# Altium PCB ECUv2.PcbDoc
Units mil, origin at the board's own origin, x right, y up, seen from the top; angles counter-clockwise.
Board outline 2795 x 4000 mil, 2 copper layers (Top Layer, Bottom Layer); 10 components, 16 nets, 113 pads, 0 vias.
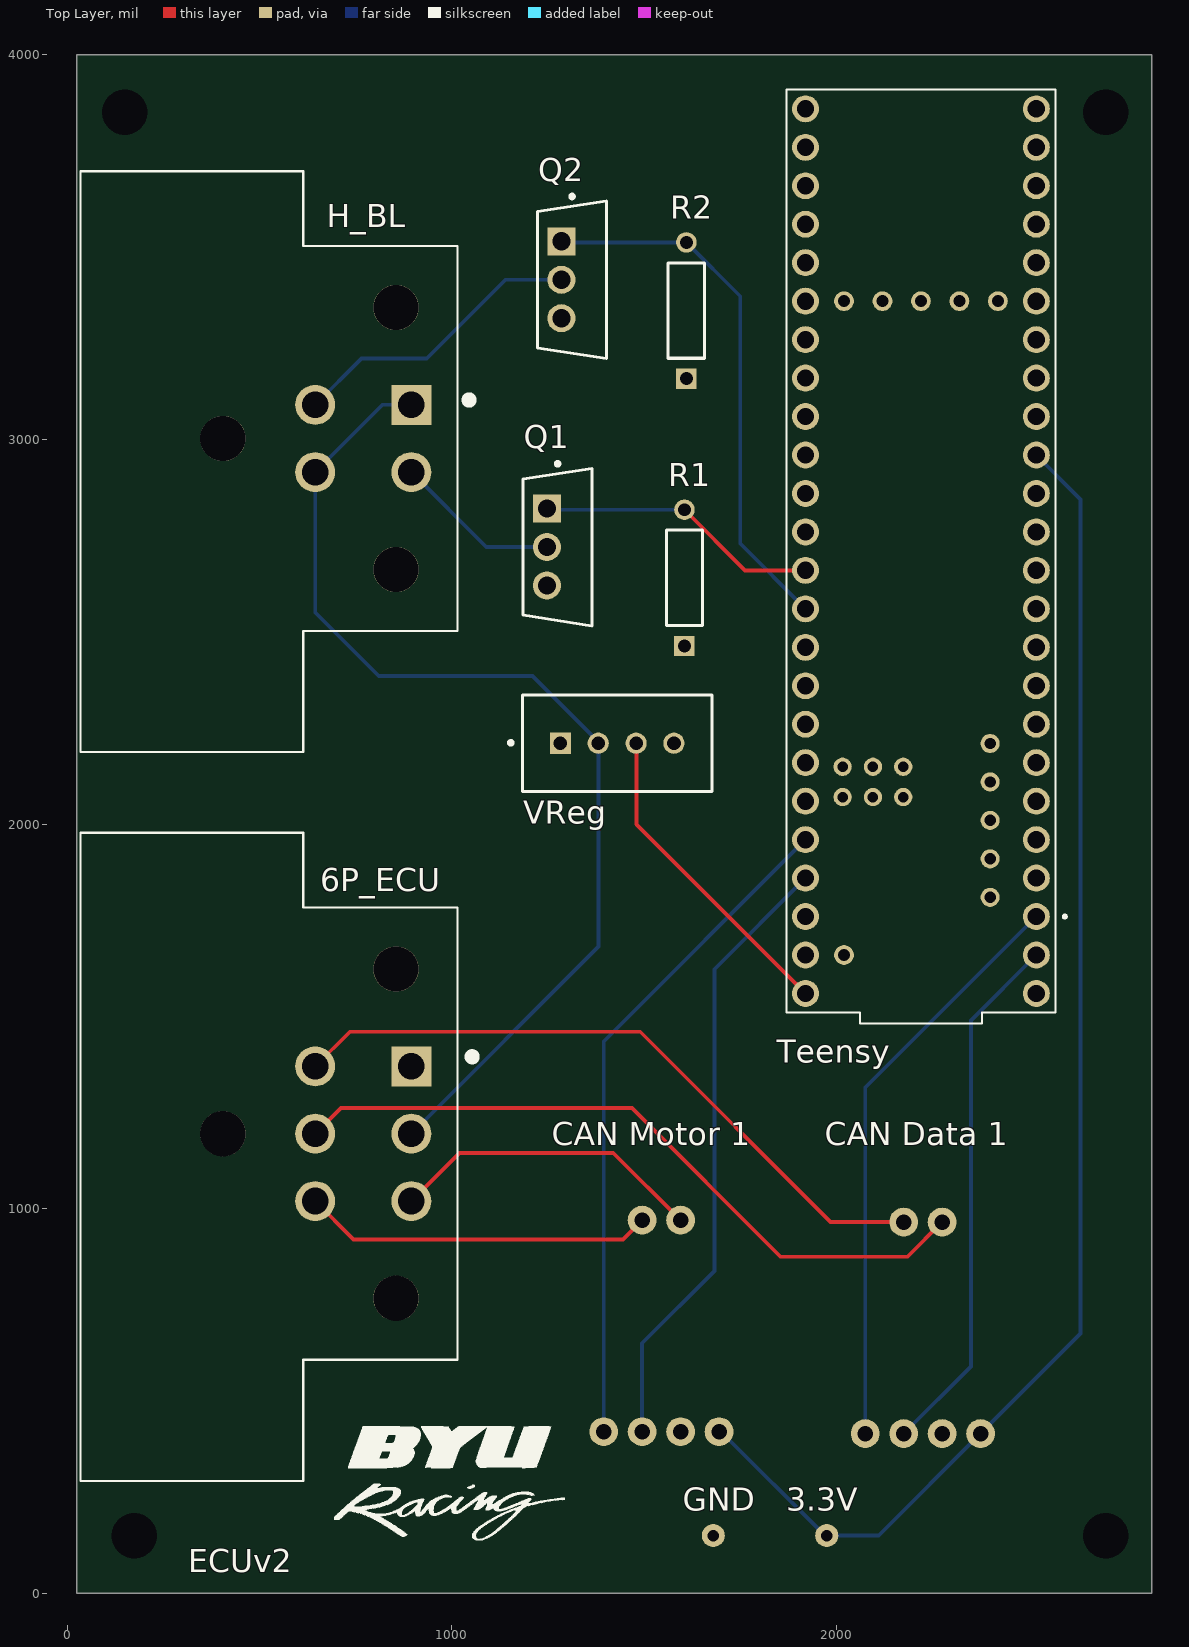
[diagram p0: Top Layer view]
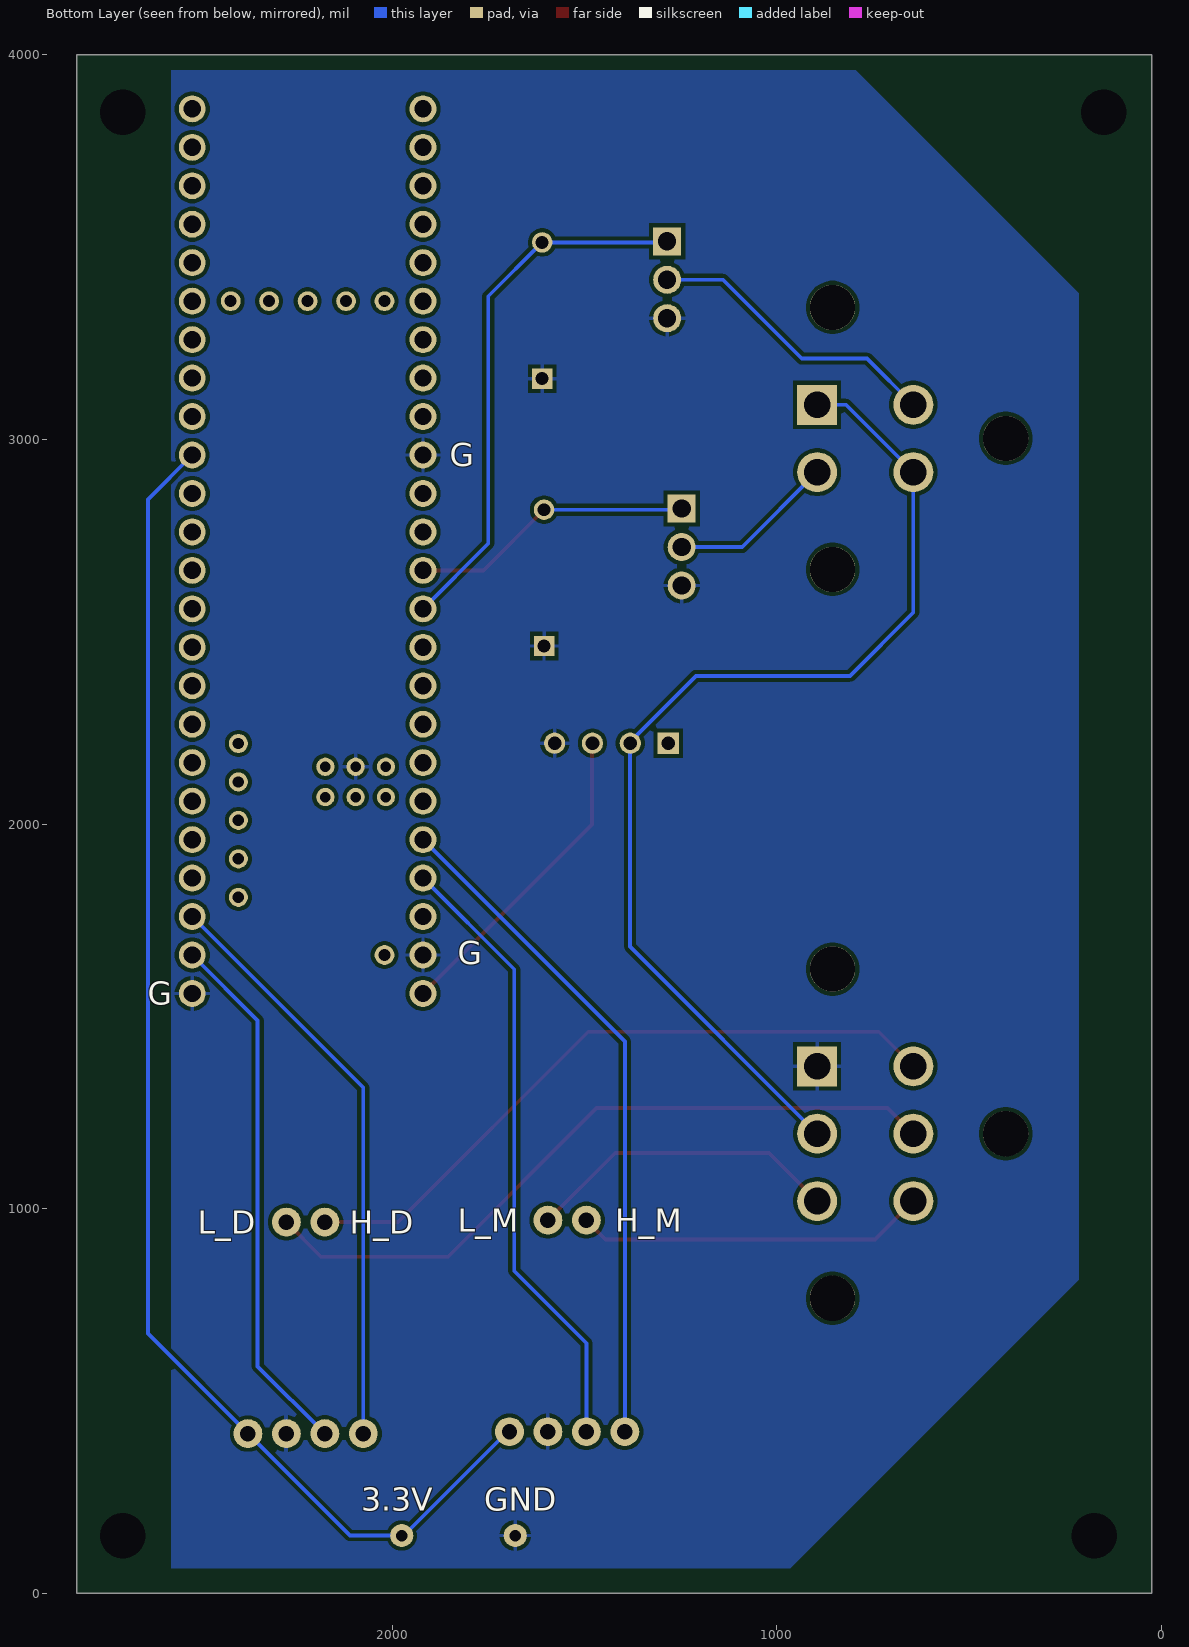
[diagram p1: Bottom Layer view, seen from below]

## Layer stack, top to bottom
Top Solder: solder mask 0.4, Solder Resist, Dk 3.5
Top Layer: signal copper 1.4
Dielectric 1: dielectric 12.6, FR-4, Dk 4.8
Bottom Layer: signal copper 1.4
Bottom Solder: solder mask 0.4, Solder Resist, Dk 3.5

## Board outline
25,0 2820,0 2820,4000 25,4000

## Design rules (kind name [scope] priority, off if disabled: settings)
Clearance [All] p1: gap=10 ignorepadtopadclearanceinfootprint=FALSE
HoleSize [All] p1: absolutevalues=TRUE maxlimit=120 minlimit=1 maxpercent=80.000 minpercent=20.000
PolygonConnect [All] p1: connectstyle=Relief reliefconductorwidth=10 reliefentries=4 polygonreliefangle="90 Angle" airgapwidth=10
RoutingVias [All] p1: holewidth=28 width=50 viastyle="Through Hole" minholewidth=28 minwidth=50 maxholewidth=28 maxwidth=50
SolderMaskExpansion [All] p1: expansion=4 istentingtop=FALSE
SupplyNets "Schematic Supply Nets" [InNet('GND')] p1: voltage=0.000
Width [All] p1: maxlimit=10 minlimit=10 preferedwidth=10
29 further rules are at their usual default settings.

## Components (designator, comment, footprint, x,y, rotation, side; value= is the part's Value field where it differs from the comment)
6P_ECU "DT13-6P" TE_DT13-6P 645,1194.8 r0 top
"CAN Data 1" "CAN Module" "CAN Module-Footprint-1" 2375,415 r90 top
"CAN Motor 1" "CAN Module" "CAN Module-Footprint-1" 1695,420 r90 top
H_BL "DT13-4P" TE_DT13-4P 645,3002.4 r0 top
Q1 "IRLZ44NPbF" FP-PG-TO220-3-MFG 1275,2720 r0 top
Q2 "IRLZ44NPbF" FP-PG-TO220-3-MFG 1312.76,3415 r0 top
R1 "MFR-25FBF5210K" RESA60-630X240 1605,2640 r90 top
R2 "MFR-25FBF5210K" RESA60-630X240 1610,3335 r90 top
Teensy "DEV-16771" MODULE_DEV-16771 2219.8,2709.37 r90 top
VReg "B04B-XASK-1(LF)(SN)" FP-B04B-XASK-1_LF_SN-MFG 1430,2210 r180 top

## Footprints (in the part's own frame and the unit in brackets; to place one, negate y for a bottom-side part, rotate by r counter-clockwise, add the part's x,y. Pads: shape width x height; smd on the part's side, far side on the other; paste and mask are expansions set on the pad)
"CAN Module-Footprint-1" [mil]
  round 75 hole 40: 1(0,300) 2(0,200) 3(0,100) 4(0,0) 5(550,200) 6(550,100)
FP-B04B-XASK-1_LF_SN-MFG [mm]
  rect 1.4x1.4 hole 0.9 paste-2539.97 mask+0: 1(3.75,0)
  round 1.4 hole 0.9 paste-2539.97 mask+0: 2(1.25,0) 3(-1.25,0) 4(-3.75,0)
  silkscreen extent -6.25,-3.2 7.15,3.2, body extent -6.35,-3.3 6.35,3.3, height 0.25
FP-PG-TO220-3-MFG [mm]
  rect 1.85x1.85 hole 1.2 paste-2539.97 mask+0: 1(-0.705,2.54)
  round 1.85 hole 1.2 paste-2539.97 mask+0: 2(-0.705,0) 3(-0.705,-2.54)
  silkscreen extent -2.27,-5.2 2.27,5.62, body extent -2.37,-5.55 2.37,5.55, height 0.25
MODULE_DEV-16771 [mil]
  round 70 hole 45: 0(-1050,-300) 1(-950,-300) 2(-850,-300) 3(-750,-300) 3.3V_1(250,-300) 3.3V_2(-950,300) 4(-650,-300) 5(-550,-300) 6(-450,-300) 7(-350,-300) 8(-250,-300) 9(-150,-300) 10(-50,-300) 11(50,-300) 12(150,-300) 13(150,300) 14(50,300) 15(-50,300) 16(-150,300) 17(-250,300) 18(-350,300) 19(-450,300) 20(-550,300) 21(-650,300) 22(-750,300) 23(-850,300) 24(350,-300) 25(450,-300) 26(550,-300) 27(650,-300) 28(750,-300) 29(850,-300) 30(950,-300) 31(1050,-300) 32(1150,-300) 33(1150,300) 34(1050,300) 35(950,300) 36(850,300) 37(750,300) 38(650,300) 39(550,300) 40(450,300) 41(350,300) GND1(-1150,-300) GND2(250,300) GND3(-1050,300) VIN(-1150,300)
  round 51.5 hole 31.5: 3.3V_3(650,-100) GND4(650,0) ON/OFF(650,200) PROGRAM(650,100) VBAT(650,-200) VUSB(-1050,200)
  round 49.53 hole 29.53: 5V(-900,-179.92) D+(-700,-179.92) D-(-800,-179.92) USB_GND1(-600,-179.92) USB_GND2(-500,-179.92)
  round 47.56 hole 27.56: GND5(-560.63,124.8) LED(-639.37,124.8) R+(-639.37,203.54) R-(-560.63,203.54) T+(-560.63,46.06) T-(-639.37,46.06)
  silkscreen extent -1228,-378 1200,350, body extent -1228,-350 1200,350, height 282
RESA60-630X240 [mm] "Axial Resistor, 2-Leads, Dia 2.4mm, Body Length 6.3mm"
  rect 1.35x1.35 hole 0.85: 1(-4.5,0)
  round 1.35 hole 0.85: 2(4.5,0)
  silkscreen extent -3.15,-1.2 3.15,1.2, body extent -3.15,-1.2 3.15,1.2, height 2.4
TE_DT13-4P [mm]
  rect 2.64x2.64 hole 1.76: 1(6.35,2.225)
  round 2.64 hole 1.76: 2(6.35,-2.225) 3(0,-2.225) 4(0,2.225)
  round 2.99 hole 2.99 unplated: ""(-6.1,0) ""(5.33,-8.65) ""(5.33,8.65)
  silkscreen extent -15.5,-20.71 10.41,17.64
TE_DT13-6P [mm]
  rect 2.64x2.64 hole 1.76: 1(6.35,4.45)
  round 2.64 hole 1.76: 2(6.35,0) 3(6.35,-4.45) 4(0,-4.45) 5(0,0) 6(0,4.45)
  round 2.99 hole 2.99 unplated: ""(-6.1,0) ""(5.33,-10.87) ""(5.33,10.87)
  silkscreen extent -15.5,-22.93 10.61,19.87

## Part data
6P_ECU: "DT13 Series, 4.44mm Pitch 6 Way 2 Row Right Angle PCB Header, Solder Termination", Package=None, Availability=Unavailable, DigiKey-Purchase-URL=https://snapeda.com/shop?store=DigiKey&id=1897474, EU_RoHS_Compliance=Compliant, MF="TE Connectivity", MP=DT13-6P, Price=None, SnapEDA_Link=https://www.snapeda.com/parts/DT13-6P/TE%20Connectivity%20Deutsch%20Connectors/view-part/1897474/?ref=snap
"CAN Data 1" "CAN Motor 1": library part CMP-00030-00003-1, "CAN waveshare"
H_BL: "DT13 Series, 4.44mm Pitch 4 Way 2 Row Right Angle PCB Header, Solder Termination", Package=None, Availability=Unavailable, MF="TE Connectivity", MP=DT13-4P, Price=None, SnapEDA_Link=https://www.snapeda.com/parts/DT13-4P/TE%20Connectivity%20Deutsch%20Connectors/view-part/2708791/?ref=snap, TE_purchase_URL=https://www.te.com/usa-en/product-DT13-4P.html?te_bu=Cor&te_type=disp&te_campaign=seda_glo_cor-seda-global-disp-prtnr-fy19-seda-model-bom-cta_sma-317_1&elqCampaignId=32493
Q1 Q2: library part CMP-32901-000488-1, "MOSFET N-CH 55V 47A TO220AB", Case/Package=TO-220, Continuous Drain Current (ID)=47A, Drain to Source Breakdown Voltage=55V, Drain to Source Resistance=35mR, Gate to Source Voltage (Vgs)=16V, Input Capacitance=1.7nF, Max Operating Temperature=175°C, Max Power Dissipation=110W, Min Operating Temperature=-55°C, Threshold Voltage=2V, Drain to Source Voltage (Vdss)=55V, Element Configuration=Single, Halogen Free="Halogen Free", Height=0.6inch, Lead Free="Lead Free", Length=0.414inch, Max Dual Supply Voltage=55V, Mount="Through Hole", Number of Pins=3, Packaging=Rail/Tube, Power Dissipation=110W, Rds On Max=22mR, REACH SVHC="No SVHC", RoHS Compliant=Yes, Turn-Off Delay Time=26ns, Turn-On Delay Time=11ns, Width=0.185inch
R1 R2: library part CMP-1659-00074-2, "Axial Resistor, 10 KOhm, +/- 1%, 0.25 W, -55 to 155 degC, 2-Pin THD, RoHS, Bulk", Case\/Package=Axial, Manufacturer=Yageo, Max Operating Temperature=155degC, Max Power Dissipation=250mW, Min Operating Temperature=-55degC, Package Description="2-Pin Axial Lead, Dia 2.4 mm, Body Length 6.3 mm", Package Quantity=200, Package Reference=MFR-25, Resistance=10KOhm, Temperature Coefficient=100ppm\/degreesC, Tolerance=1%, Voltage Rating=250V, Voltage Rating (DC)=200V, Composition=MetalFilm, Datasheet URL=http://www.yageo.com/documents/recent/Yageo%20LR_MFR_2013.pdf, Datasheet Version=04/2013, Lead Free=LeadFree, Length=0.248inch, Manufacturer URL=http://www.yageo.com/, Military Standard=Not, Mount=ThroughHole, Mounting Technology=ThroughHole, Number of Terminations=2, Packaging=Bulk, Power Rating=250mW, RoHSCompliant=True, Termination=Axial
Teensy: "RT1062 Teensy 4.1 series ARM® Cortex®-M7 MPU Embedded Evaluation Board", Package=None, Check_prices=https://www.snapeda.com/parts/DEV-16771/SparkFun+Electronics/view-part/?ref=eda, MF="SparkFun Electronics", MP=DEV-16771, SnapEDA_Link=https://www.snapeda.com/parts/DEV-16771/SparkFun+Electronics/view-part/?ref=snap
VReg: library part CMP-17439-000018-1, "CONN HEADER VERT 4POS 2.5MM", Current Rating=3A, Manufacturer=JST, Temperature="-25°C to +85°C", Temperature Range High=+85°C, Temperature Range Low=-25°C, Voltage Rating=250V, Automotive=No, Category=Conn, ComponentLink2Description=Datasheet, ComponentLink2URL=http://www.jst-mfg.com/product/pdf/eng/eXA1.pdf, Conn Gender=Male, Conn Orientation=Straight, Contact Material=Tin,Copper, Device Class L1=Connectors, Device Class L2="Headers and Wire Housings", Device Class L3=unset, Digikey Description="CONN HEADER VERT 4POS 2.5MM", Height=8.8mm, Lead Free=Yes, Manufacturer Part Number=B04B-XASK-1(LF)(SN), Number of Contacts=4, Number of Rows=1, Octopart=https://octopart.com/b04b-xask-1%28lf%29%28sn%29-jst-3990149, Package=B04B-XASK-1(LF)(SN), Pitch=2.5mm, RoHS=TRUE

## Free pads (board coordinates)
  round 60 hole 118.11: 3(150,3850) 3(175,150) 3(2700,150) 3(2700,3850)
  round 60 hole 30: 4(1680,150) 5(1975,150)

## Nets (pads, with @x,y where several pads share a name; then routed paths per layer and width w, separated by ;. In a path a pad name is that pad's centre, name@x,y a point inside that pad or via, vN(x,y) a via of type N, cw(c..) or ccw(c..) an arc to the next point about the centre after c; other vN are vias at no path point)
3.3V: "CAN Data 1.4" "CAN Motor 1.4" pad.5 Teensy.3.3V_1 | length 3601.4
  Bottom Layer w10: 1695,420 1700,420 1970,150 pad.5 2110,150 2375,415 2635,675 2635,2844.17 Teensy.3.3V_1
5V: Teensy.VIN VReg.3 | length 836.5
  Top Layer w10: VReg.3@1480,2205 1480,1999.17 Teensy.VIN Teensy.VIN@1919.8,1568.07
12V: 6P_ECU.2 H_BL.1 H_BL.3 VReg.2 | length 2783.5
  Bottom Layer w10: 6P_ECU.2 1381.57,1681.38 1381.57,2213.43 1210,2385 810,2385 645,2550 H_BL.3 820.2,3090 H_BL.1
"BL IN": H_BL.4 Q2.2 | length 774.6
  Bottom Layer w10: H_BL.4 765,3210 935,3210 1140,3415 Q2.2
CANH_D: 6P_ECU.6 "CAN Data 1.5" | length 1772.3
  Top Layer w10: 6P_ECU.6 735,1460 1490,1460 1985,965 2175,965
CANH_M: 6P_ECU.4 "CAN Motor 1.5" | length 912
  Top Layer w10: 6P_ECU.4 744.61,920 1445,920 1495,970
CANL_D: 6P_ECU.5 "CAN Data 1.6" | length 1855.2
  Top Layer w10: 6P_ECU.5 711.97,1261.77 1468.23,1261.77 1855,875 2185,875 2275,965
CANL_M: 6P_ECU.3 "CAN Motor 1.6" | length 824.4
  Top Layer w10: 6P_ECU.3 1020.39,1145 1420,1145 1595,970
CRX11: "CAN Motor 1.2" Teensy.23 | length 1615.3
  Bottom Layer w10: 1495,420 1495,650 1682.72,837.72 1682.72,1622.28 Teensy.23
CRX21: "CAN Data 1.2" Teensy.0 | length 1387.2
  Bottom Layer w10: 2175,415 2349.65,589.65 2349.65,1489.22 Teensy.0
CTX11: "CAN Motor 1.1" Teensy.22 | length 1756.8
  Bottom Layer w10: 1395,420 1395,1434.57 Teensy.22
CTX21: "CAN Data 1.1" Teensy.1 | length 1528.6
  Bottom Layer w10: 2075,415 2075,1314.57 Teensy.1
D2: Q1.1 R1.2 Teensy.15 | length 739.1
  Top Layer w10: R1.2 1762.8,2659.37 Teensy.15
  Bottom Layer w10: Q1.1 1250.08,2817.17 R1.2
D3: Q2.1 R2.2 Teensy.16 | length 1407.3
  Bottom Layer w10: Q2.1 1287.83,3512.17 R2.2 1750,3372.17 1750,2729.17 Teensy.16
GND: 6P_ECU.1 "CAN Data 1.3" "CAN Motor 1.3" pad.4 Q1.3 Q2.3 R1.1 R2.1 Teensy.GND1 Teensy.GND2 Teensy.GND3 Teensy.GND5 VReg.4
"HORN IN": H_BL.2 Q1.2 | length 432.9
  Bottom Layer w10: H_BL.2 1089.8,2720 Q1.2
pads on no net: 6P_ECU. H_BL. Teensy.2 Teensy.3 Teensy.3.3V_2 Teensy.3.3V_3 Teensy.4 Teensy.5 Teensy.5V Teensy.6 Teensy.7 Teensy.8 Teensy.9 Teensy.10 Teensy.11 Teensy.12 Teensy.13 Teensy.14 Teensy.17 Teensy.18 Teensy.19 Teensy.20 Teensy.21 Teensy.24 Teensy.25 Teensy.26 Teensy.27 Teensy.28 Teensy.29 Teensy.30 Teensy.31 Teensy.32 Teensy.33 Teensy.34 Teensy.35 Teensy.36 Teensy.37 Teensy.38 Teensy.39 Teensy.40 Teensy.41 Teensy.D+ Teensy.D- Teensy.GND4 Teensy.LED Teensy.ON/OFF Teensy.PROGRAM Teensy.R+ Teensy.R- Teensy.T+ Teensy.T- Teensy.USB_GND1 Teensy.USB_GND2 Teensy.VBAT Teensy.VUSB VReg.1

## Polygon pours and split planes (outlines as drawn)
GND on Bottom Layer "GND_L02_P000" (solid, pour order 0): 2575,3960 2575,3925 2575,65 965,65 705,325 215,815 215,3380 795,3960

## Silkscreen, mask and mechanical layers (free items; w line width, h text height)
Top Overlay:
  drawing of 4 lines, arcs and shapes, not listed
  text "GND" at 1600,215 h60
  text "3.3V" at 1870,215 h60
  text "ECUv2" at 315,55 h60
Bottom Overlay:
  text "G" at 1850,2930 h60
  text "G" at 1830,1635 h60
  text "G" at 2635,1530 h60
  text "H_M" at 1420,940 h60
  text "L_M" at 1830,940 h60
  text "H_D" at 2110,935 h60
  text "L_D" at 2505,935 h60
  text "GND" at 1760,215 h60
  text "3.3V" at 2080,215 h60

## Text inside footprints (layer, text, board x,y; h text height)
Teensy: Mechanical 13 "Teensy 4.1" at 2206.42,2699.53 h50 r90